# Altium PCB MAIN_PCB.PcbDoc
Units mm, origin at the board's own origin, x right, y up, seen from the top; angles counter-clockwise.
Board outline 115 x 170 mm, 2 copper layers (Top Layer, Bottom Layer); 11 components, 29 nets, 185 pads, 16 vias.
Unrouted connection lines stored in the file: 20.
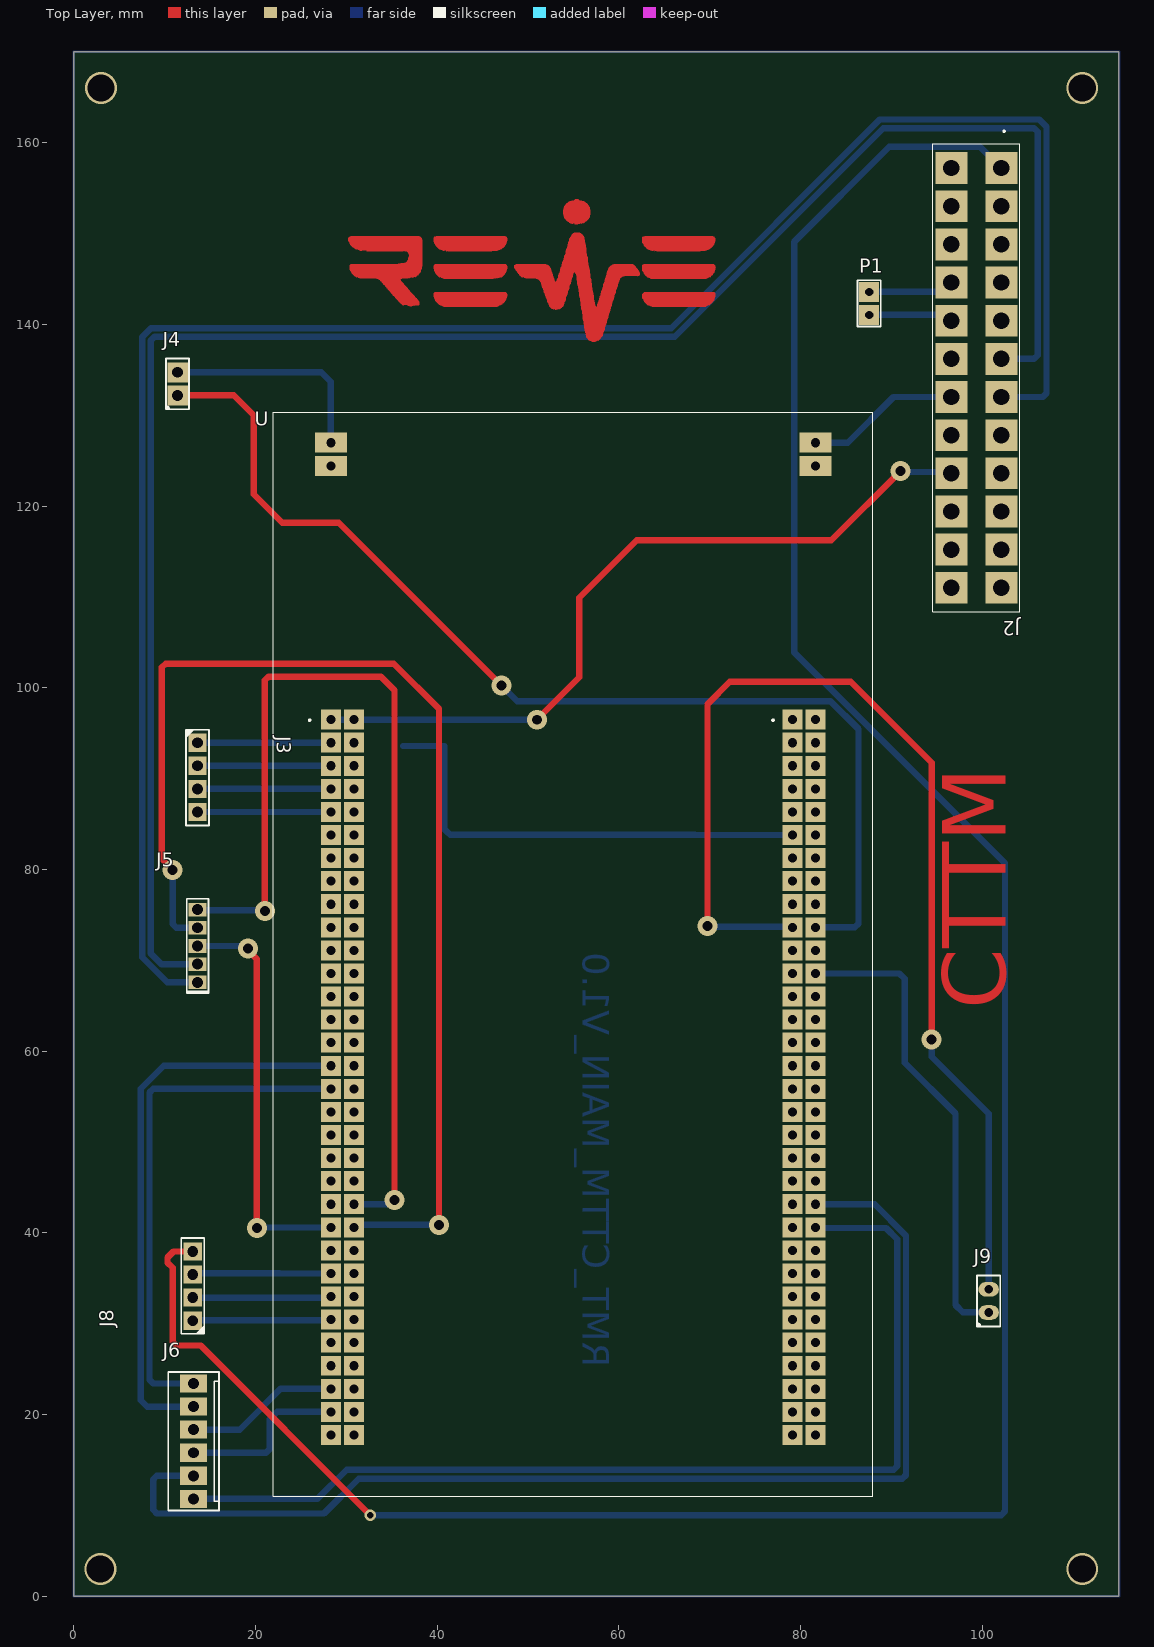
[diagram p0: Top Layer view]
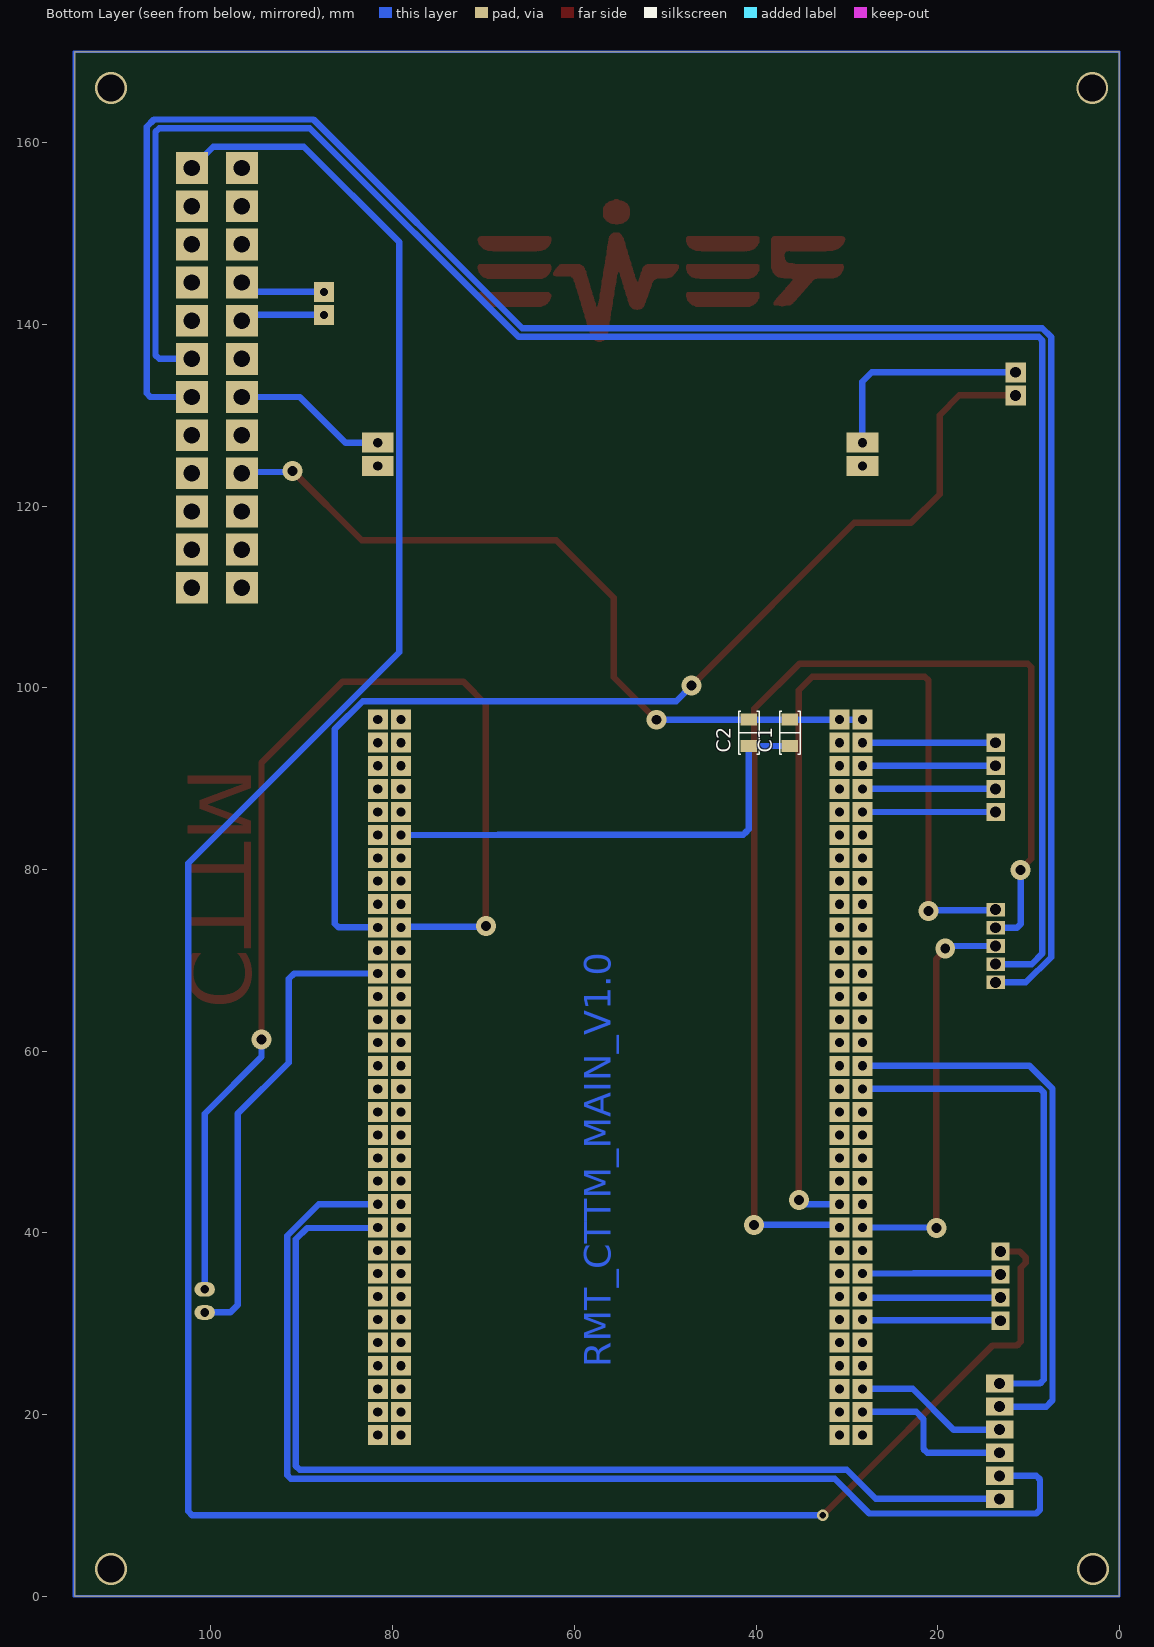
[diagram p1: Bottom Layer view, seen from below]
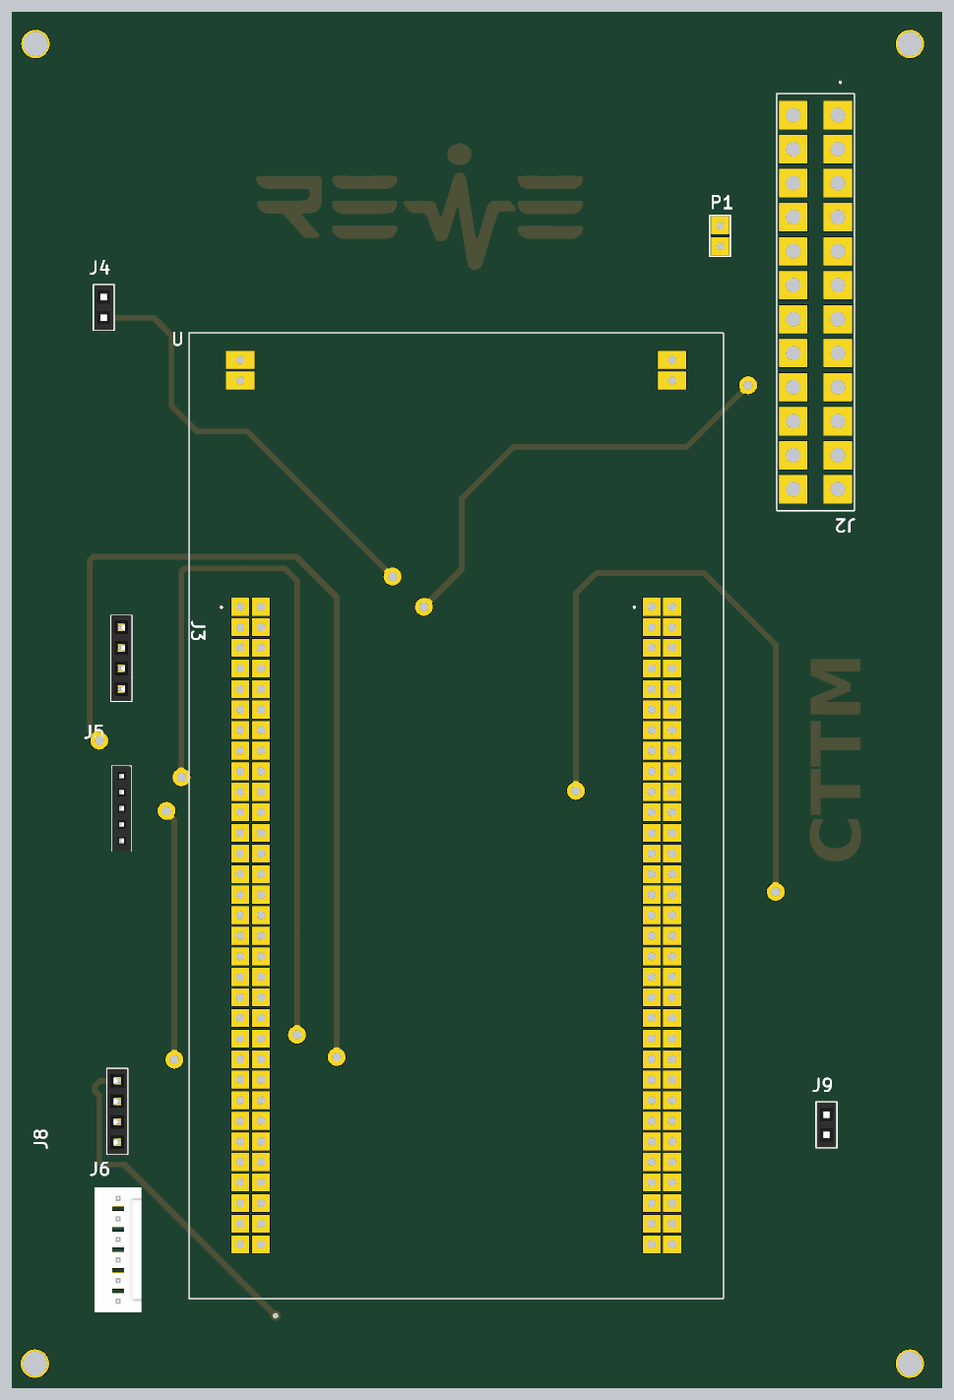
[diagram p2: 3D render of the assembled board from above, using the file's embedded part models]

## Layer stack, top to bottom
Top Solder: solder mask 0.0102, Solder Resist, Dk 3.5
Top Layer: signal copper 0.0356
Dielectric 1: dielectric 0.32, FR-4, Dk 4.8
Bottom Layer: signal copper 0.0356
Bottom Solder: solder mask 0.0102, Solder Resist, Dk 3.5

## Board outline
0,0 0,170 115,170 115,0

## Design rules (kind name [scope] priority, off if disabled: settings)
Clearance [All] p1: gap=0.254 ignorepadtopadclearanceinfootprint=FALSE except(0: Arc-Hole Track-Hole SMDPad-Hole THPad-Hole Via-Hole Fill-Hole Poly-Hole Region-Hole Text-Hole)
PolygonConnect [All] p1: connectstyle=Relief reliefconductorwidth=0.254 reliefentries=4 polygonreliefangle="90 Angle" airgapwidth=0.254
RoutingVias [All] p1: holewidth=0.711 width=1.27 viastyle="Through Hole" minholewidth=0.711 minwidth=1.27 maxholewidth=0.711 maxwidth=1.27
SolderMaskExpansion [All] p1: expansion=0.102 istentingtop=FALSE
Width [All] p1: maxlimit=0.7 minlimit=0.7 preferedwidth=0.7
30 further rules are at their usual default settings.

## Classes and differential pairs
component class "POWER_SUPPLY ATX24_PIN_SCH": J2 P1
component class MAIN_SCH: C1 C2 J3 J4 J5 J6 J8 J9 U

## Components (designator, comment, footprint, x,y, rotation, side; value= is the part's Value field where it differs from the comment)
C1 "100pF" "CAP 1206_3216 - 0.8MM" 36.275,95.038 r90 bottom
C2 "100pF" "CAP 1206_3216 - 0.8MM" 40.8,95.038 r90 bottom
J2 "4-1775099-8" TE_4-1775099-8 102.1,157.2 r270 top
J3 "M20-7820442" "HARWIN M20-7820445" 13.625,90.138 r0 top
J4 "LOAD_CELL" "SAMTEC SSW-102-03-T-S"#1 11.425,133.45 r90 top
J5 "NPPN051BFCN-RC" "SULLINS NPPN051BFCN" 13.625,71.575 r90 top
J6 "SWITCHING" "MOLEX KK 0022272061" 13.185,17.064 r90 top
J8 "M20-7820442" "HARWIN M20-7820445" 13.1,34.135 r180 top
J9 "SSW-102-03-T-S" "SAMTEC SSW-102-03-T-S"#2 100.7,32.5 r90 top
P1 "PS_JUMPER" HDR1X2 87.55,141.035 r90 top
U "STM32F429I-DISC1" MODULE_STM32F429I-DISC1 54.968,70.658 r0 top

## Footprints (in the part's own frame and the unit in brackets; to place one, negate y for a bottom-side part, rotate by r counter-clockwise, add the part's x,y. Pads: shape width x height; smd on the part's side, far side on the other; paste and mask are expansions set on the pad)
"CAP 1206_3216 - 0.8MM" [mm] "Chip Capacitor, 2-Leads, Body 3.25x1.60mm, IPC Medium Density"
  rect 1.3x1.8 smd: 1(-1.45,0) 2(1.45,0)
  silkscreen extent -2.37,-1.12 2.37,1.12, body extent -1.6,-0.8 1.6,0.8, height 0.8
"HARWIN M20-7820445" [mm] "2.54mm DIL PC TAIL PIN HEADER ASSEMBLY"
  rect 2x2 hole 1.2: 1(0,3.81) 2(0,1.27) 3(0,-1.27) 4(0,-3.81)
  silkscreen extent -1.27,-5.3 1.27,5.27, body extent -1.25,-5.28 1.25,5.28, height 8.5
HDR1X2 [mm] "Connector; Header; 2 Position"
  rect 2.2x2.2 hole 0.9: 1(0,0) 2(2.54,0)
  silkscreen extent -1.27,-1.27 3.81,1.27
MODULE_STM32F429I-DISC1 [mm]
  rect 3.5x2.2 hole 1: JP1_1(-26.67,56.31) JP1_2(-26.67,53.77) JP2_1(26.67,56.31) JP2_2(26.67,53.77)
  rect 2.2x2.2 hole 1: P1_1(-26.67,25.83) P1_2(-24.13,25.83) P1_3(-26.67,23.29) P1_4(-24.13,23.29) P1_5(-26.67,20.75) P1_6(-24.13,20.75) P1_7(-26.67,18.21) P1_8(-24.13,18.21) P1_9(-26.67,15.67) P1_10(-24.13,15.67) P1_11(-26.67,13.13) P1_12(-24.13,13.13) P1_13(-26.67,10.59) P1_14(-24.13,10.59) P1_15(-26.67,8.05) P1_16(-24.13,8.05) P1_17(-26.67,5.51) P1_18(-24.13,5.51) P1_19(-26.67,2.97) P1_20(-24.13,2.97) P1_21(-26.67,0.43) P1_22(-24.13,0.43) P1_23(-26.67,-2.11) P1_24(-24.13,-2.11) P1_25(-26.67,-4.65) P1_26(-24.13,-4.65) P1_27(-26.67,-7.19) P1_28(-24.13,-7.19) P1_29(-26.67,-9.73) P1_30(-24.13,-9.73) P1_31(-26.67,-12.27) P1_32(-24.13,-12.27) P1_33(-26.67,-14.81) P1_34(-24.13,-14.81) P1_35(-26.67,-17.35) P1_36(-24.13,-17.35) P1_37(-26.67,-19.89) P1_38(-24.13,-19.89) P1_39(-26.67,-22.43) P1_40(-24.13,-22.43) P1_41(-26.67,-24.97) P1_42(-24.13,-24.97) P1_43(-26.67,-27.51) P1_44(-24.13,-27.51) P1_45(-26.67,-30.05) P1_46(-24.13,-30.05) P1_47(-26.67,-32.59) P1_48(-24.13,-32.59) P1_49(-26.67,-35.13) P1_50(-24.13,-35.13) P1_51(-26.67,-37.67) P1_52(-24.13,-37.67) P1_53(-26.67,-40.21) P1_54(-24.13,-40.21) P1_55(-26.67,-42.75) P1_56(-24.13,-42.75) P1_57(-26.67,-45.29) P1_58(-24.13,-45.29) P1_59(-26.67,-47.83) P1_60(-24.13,-47.83) P1_61(-26.67,-50.37) P1_62(-24.13,-50.37) P1_63(-26.67,-52.91) P1_64(-24.13,-52.91) P2_1(24.13,25.83) P2_2(26.67,25.83) P2_3(24.13,23.29) P2_4(26.67,23.29) P2_5(24.13,20.75) P2_6(26.67,20.75) P2_7(24.13,18.21) P2_8(26.67,18.21) P2_9(24.13,15.67) P2_10(26.67,15.67) P2_11(24.13,13.13) P2_12(26.67,13.13) P2_13(24.13,10.59) P2_14(26.67,10.59) P2_15(24.13,8.05) P2_16(26.67,8.05) P2_17(24.13,5.51) P2_18(26.67,5.51) P2_19(24.13,2.97) P2_20(26.67,2.97) P2_21(24.13,0.43) P2_22(26.67,0.43) P2_23(24.13,-2.11) P2_24(26.67,-2.11) P2_25(24.13,-4.65) P2_26(26.67,-4.65) P2_27(24.13,-7.19) P2_28(26.67,-7.19) P2_29(24.13,-9.73) P2_30(26.67,-9.73) P2_31(24.13,-12.27) P2_32(26.67,-12.27) P2_33(24.13,-14.81) P2_34(26.67,-14.81) P2_35(24.13,-17.35) P2_36(26.67,-17.35) P2_37(24.13,-19.89) P2_38(26.67,-19.89) P2_39(24.13,-22.43) P2_40(26.67,-22.43) P2_41(24.13,-24.97) P2_42(26.67,-24.97) P2_43(24.13,-27.51) P2_44(26.67,-27.51) P2_45(24.13,-30.05) P2_46(26.67,-30.05) P2_47(24.13,-32.59) P2_48(26.67,-32.59) P2_49(24.13,-35.13) P2_50(26.67,-35.13) P2_51(24.13,-37.67) P2_52(26.67,-37.67) P2_53(24.13,-40.21) P2_54(26.67,-40.21) P2_55(24.13,-42.75) P2_56(26.67,-42.75) P2_57(24.13,-45.29) P2_58(26.67,-45.29) P2_59(24.13,-47.83) P2_60(26.67,-47.83) P2_61(24.13,-50.37) P2_62(26.67,-50.37) P2_63(24.13,-52.91) P2_64(26.67,-52.91)
  silkscreen extent -33,-59.65 33,59.65
"MOLEX KK 0022272061" [mm]
  rect 2x3 hole 1.2: 1(-6.35,0) 2(-3.81,0) 3(-1.27,0) 4(1.27,0) 5(3.81,0) 6(6.35,0)
  silkscreen extent -7.62,-2.79 7.62,2.79, body extent -7.62,-2.9 7.62,2.9, height 11.7
"SAMTEC SSW-102-03-T-S"#1 [mm]
  rect 2.2x2.25 hole 1.2: 1(-1.27,0) 2(1.27,0)
  silkscreen extent -2.8,-1.27 2.8,1.27, body extent -2.79,-1.21 2.79,1.21, height 8.51
"SAMTEC SSW-102-03-T-S"#2 [mm]
  oval 1.6x2.25 hole 0.95: 1(-1.27,0) 2(1.27,0)
  silkscreen extent -2.8,-1.27 2.8,1.27, body extent -2.79,-1.21 2.79,1.21, height 8.51
"SULLINS NPPN051BFCN" [mm]
  rect 1.5x2 hole 1.2: 1(-4,0) 2(-2,0) 3(0,0) 4(2,0) 5(4,0)
  silkscreen extent -5.2,-1.2 5.2,1.2, body extent -5.25,-1.2 5.25,1.2, height 4.41
TE_4-1775099-8 [mm]
  rect 3.5x3.5 hole 1.8: 1(0,0) 2(0,-5.5) 3(4.2,0) 4(4.2,-5.5) 5(8.4,0) 6(8.4,-5.5) 7(12.6,0) 8(12.6,-5.5) 9(16.8,0) 10(16.8,-5.5) 11(21,0) 12(21,-5.5) 13(25.2,0) 14(25.2,-5.5) 15(29.4,0) 16(29.4,-5.5) 17(33.6,0) 18(33.6,-5.5) 19(37.8,0) 20(37.8,-5.5) 21(42,0) 22(42,-5.5) 23(46.2,0) 24(46.2,-5.5)
  silkscreen extent -4.15,-7.55 48.85,2.05

## Part data
C1 C2: library part MM061A101JCT2A, "CAP CER 100PF 100V C0G/NP0 1206", Device Package="1206 (3216 Metric)", Manufacturer="AVX Corporation", Operating Temperature="-55°C ~ 125°C", Supplier Part Number 1=478-10622-1-ND, Temperature Coefficient="C0G, NP0", Tolerance=±5%, Voltage - Rated=100V, Applications="Medical, Non-Critical", Capacitance=100pF, ComponentLink1Description=Datasheet, ComponentLink1URL=http://datasheets.avx.com/AVX-MM.pdf, ComponentLink2Description="DigiKey Link", ComponentLink2URL=http://digikey.com/product-detail/en/avx-corporation/MM061A101JCT2A/478-10622-1-ND/7344883, LastUpdated="9/2/2020 1:04:46 AM", Lifecycle Status=Active, Minimum Order=1, Mounting Type="Surface Mount, MLCC", Package / Case="1206 (3216 Metric)", Packaging=TapeAndReel, Part Number=MM061A101JCT2A, Part Status=Active, PartId=18685, Price=0.52, Series=MM, Size / Dimension="0.126\" L x 0.063\" W (3.20mm x 1.60mm)", Supplier 1=DigiKey, Thickness (Max)="0.029\" (0.74mm)"
J2: "Conn Power PL 24 POS 4.2mm Solder ST Thru-Hole 4 Terminal 1 Port Tray", Package=None, Availability=Unavailable, MP=4-1775099-8, Price=None
J3 J8: "CONN RCPT 4POS 0.1 GOLD PCB", Current Rating (Amps)=3A, Insulation Color=Black, Manufacturer="Harwin Inc.", Material Flammability Rating="UL94 V-0", Operating Temperature="-40°C ~ 105°C", Supplier Part Number 1=952-1791-ND, ComponentLink1Description=Datasheet, ComponentLink1URL=https://cdn.harwin.com/pdfs/Harwin_PC_Connectors_M20.pdf, ComponentLink2Description="DigiKey Link", ComponentLink2URL=https://www.digikey.com/en/products/detail/harwin-inc/M20-7820442/3727760, Connector Type=Receptacle, Contact Finish - Mating=Gold, Contact Finish - Post=Tin, Contact Finish Thickness - Mating=Flash, Contact Length - Post="0.118\" (3.00mm)", Contact Type="Female Socket", Fastening Type=Push-Pull, Insulation Height="0.335\" (8.51mm)", LastUpdated="9/21/2022 6:57:11 PM", Lifecycle Status=Active, Mated Stacking Heights="11.04mm, 12.63mm", Minimum Order=1, Mounting Type="Through Hole", Number of Positions=4, Number of Positions Loaded=All, Number of Rows=1, Packaging=Tube, Part Number=M20-7820442, Part Status=Active, Pitch - Mating="0.100\" (2.54mm)", Price=0.45, Series=M20, Style="Board to Board or Cable", Supplier 1=DigiKey, Termination=Solder
J4: library part SSW-102-03-T-S, "CONN RCPT 2POS 0.1 TIN PCB", Current Rating (Amps)="5.7A per Contact", Insulation Color=Black, Manufacturer="Samtec Inc.", Material Flammability Rating="UL94 V-0", Operating Temperature="-55°C ~ 105°C", Supplier Part Number 1=SSW-102-03-T-S-ND, ComponentLink2Description="DigiKey Link", ComponentLink2URL=http://digikey.com/product-detail/en/samtec-inc/SSW-102-03-T-S/SSW-102-03-T-S-ND/7873010, Connector Type=Receptacle, Contact Finish - Mating=Tin, Contact Finish - Post=Tin, Contact Type=Forked, Fastening Type=Push-Pull, LastUpdated="6/21/2022 3:06:02 PM", Lifecycle Status=Active, Minimum Order=1, Mounting Type="Through Hole", Number of Positions=2, Number of Positions Loaded=All, Number of Rows=1, Packaging=Bulk, Part Number=SSW-102-03-T-S, Part Status=Active, Price=0.53, Series=SSW, Style="Board to Board or Cable", Supplier 1=DigiKey, Termination=Solder
J5: "CONN HDR 5POS 0.079 GOLD PCB", Current Rating (Amps)=2A, Insulation Color=Black, Manufacturer="Sullins Connector Solutions", Material Flammability Rating="UL94 V-0", Operating Temperature="-40°C ~ 105°C", Supplier Part Number 1=S5751-05-ND, ComponentLink1Description=Datasheet, ComponentLink1URL=https://drawings-pdf.s3.amazonaws.com/10483.pdf, ComponentLink2Description="DigiKey Link", ComponentLink2URL=https://www.digikey.com/en/products/detail/sullins-connector-solutions/NPPN051BFCN-RC/804807, Connector Type=Header, Contact Finish - Mating=Gold, Contact Finish - Post=Gold, Contact Finish Thickness - Mating=Flash, Contact Length - Post="0.094\" (2.40mm)", Contact Type="Female Socket", Fastening Type=Push-Pull, Insulation Height="0.173\" (4.40mm)", LastUpdated="6/21/2022 2:43:08 PM", Lifecycle Status=Active, Minimum Order=1, Mounting Type="Through Hole", Number of Positions=5, Number of Positions Loaded=All, Number of Rows=1, Packaging=Tube, Part Number=NPPN051BFCN-RC, Part Status=Active, Pitch - Mating="0.079\" (2.00mm)", Price=0.35, Series=-, Style="Board to Board", Supplier 1=DigiKey, Termination=Solder
J6: library part 0022272061, "CONN HEADER VERT 6POS 2.54MM", Insulation Color=Natural, Manufacturer=Molex, Material Flammability Rating="UL94 V-0", Supplier Part Number 1=WM4115-ND, ComponentLink1Description=Datasheet, ComponentLink1URL=https://www.molex.com/pdm_docs/sd/022272061_sd.pdf, ComponentLink2Description="DigiKey Link", ComponentLink2URL=http://digikey.com/product-detail/en/molex/0022272061/WM4115-ND/1130581, Connector Type=Header, Contact Finish - Mating=Tin, Contact Finish - Post=Tin, Contact Finish Thickness - Mating="100.0µin (2.54µm)", Contact Length - Mating="0.295\" (7.49mm)", Contact Length - Post="0.140\" (3.56mm)", Contact Material=Brass, Contact Shape=Square, Contact Type="Male Pin", Fastening Type="Friction Lock", Insulation Height="0.461\" (11.70mm)", Insulation Material="Polyamide (PA), Nylon", LastUpdated="1/12/2020 11:52:24 PM", Lifecycle Status=Active, Minimum Order=1, Mounting Type="Through Hole", Number of Positions=6, Number of Positions Loaded=All, Number of Rows=1, Overall Contact Length="0.560\" (14.22mm)", Packaging=Bulk, Part Number=0022272061, Part Status=Active, PartId=80, Pitch - Mating="0.100\" (2.54mm)", Price=0.49, Series="KK 6410", Shrouding="Shrouded - 1 Wall", Style="Board to Cable/Wire", Supplier 1=DigiKey, Termination=Solder
J9: "CONN RCPT 2POS 0.1 TIN PCB", Current Rating (Amps)="5.7A per Contact", Insulation Color=Black, Manufacturer="Samtec Inc.", Material Flammability Rating="UL94 V-0", Operating Temperature="-55°C ~ 105°C", Supplier Part Number 1=SSW-102-03-T-S-ND, ComponentLink2Description="DigiKey Link", ComponentLink2URL=http://digikey.com/product-detail/en/samtec-inc/SSW-102-03-T-S/SSW-102-03-T-S-ND/7873010, Connector Type=Receptacle, Contact Finish - Mating=Tin, Contact Finish - Post=Tin, Contact Type=Forked, Fastening Type=Push-Pull, LastUpdated="6/21/2022 3:06:02 PM", Lifecycle Status=Active, Minimum Order=1, Mounting Type="Through Hole", Number of Positions=2, Number of Positions Loaded=All, Number of Rows=1, Packaging=Bulk, Part Number=SSW-102-03-T-S, Part Status=Active, Price=0.53, Series=SSW, Style="Board to Board or Cable", Supplier 1=DigiKey, Termination=Solder
P1: library part "Header 2", "Header, 2-Pin", LatestRevisionDate=17-Jul-2002, LatestRevisionNote="Re-released for DXP Platform.", Publisher="Altium Limited"
U: "STM32F429 Discovery STM32F4 ARMÂ® CortexÂ®-M4 MCU 32-Bit Embedded Evaluation Board", Package="SOIC-14 STMicroelectronics", Availability=Unavailable, MF=STMicroelectronics, MP=STM32F429I-DISC1, Price=None, SnapEDA_Link=https://www.snapeda.com/parts/STM32F429I-DISC1/STMicroelectronics/view-part/504905/?ref=snap

## Via types
v1: diameter 2.2, hole 1.1, Top Layer to Bottom Layer, 11 vias
v2: diameter 3.5, hole 3, Top Layer to Bottom Layer, 4 vias
v3: diameter 1.27, hole 0.711, Top Layer to Bottom Layer, tented both sides, 1 vias

## Nets (pads, with @x,y where several pads share a name; then routed paths per layer and width w, separated by ;. In a path a pad name is that pad's centre, name@x,y a point inside that pad or via, vN(x,y) a via of type N, cw(c..) or ccw(c..) an arc to the next point about the centre after c; other vN are vias at no path point)
3V3: J2.1 J8.4 | length 289.7
  Top Layer w0.7: J8.4 10.97,37.945 10.315,37.29 10.315,36.71 10.875,36.15 10.875,28.01 11.285,27.6 13.975,27.6 v3(32.65,8.925)
  Bottom Layer w0.7: v3(32.65,8.925) 102.09,8.925 102.5,9.335 102.5,80.674 79.284,103.89 79.284,149.059 89.779,159.554 99.746,159.554 J2.1
+3V3: J2.2 J2.23
+3V3_MC: J2.3
+5V: J2.7 J2.11 J2.20 J2.22 J5.2 | length 209.3
  Bottom Layer w0.7: J5.2 9.65,69.575 8.479,70.746 8.479,138.215 8.889,138.625 66.149,138.625 89.114,161.59 105.69,161.59 106.1,161.18 106.1,136.61 105.69,136.2 J2.11
+5V_MC: C1.2 C2.2 J2.18 U.P1_1 U.P1_2 | length 84.9
  Top Layer w0.7: v1(50.975,96.475) 55.65,101.15 55.65,109.89 61.975,116.215 83.39,116.215 v1(91.025,123.85)
  Bottom Layer w0.7: U.P1_1 U.P1_2 C1.2 C2.2 40.807,96.482 50.968,96.482 v1(50.975,96.475) ; v1(91.025,123.85) 91.134,123.741 96.459,123.741 J2.18
+12V: J2.19 J2.21
ADC_CHA0: J9.2 U.P2_19 | length 123.8
  Top Layer w0.7: v1(69.75,73.75) 69.75,98.2 72.2,100.65 85.515,100.65 94.436,91.729 v1(94.436,61.275)
  Bottom Layer w0.7: v1(69.75,73.75) 69.811,73.689 79.037,73.689 U.P2_19 ; v1(94.436,61.275) 94.436,59.364 100.7,53.1 J9.2
AIR_VALUE: J6.5 U.P1_31 | length 62.4
  Bottom Layer w0.7: J6.5 8.076,20.874 7.375,21.575 7.375,55.86 9.903,58.388 U.P1_31
DIRECTION: J8.3 U.P1_49 | length 15.4
  Bottom Layer w0.7: J8.3 13.244,35.549 22.633,35.549 22.654,35.528 U.P1_49 U.P1_49@28.194,35.424
ENABLE: J8.2 U.P1_51 | length 15.3
  Bottom Layer w0.7: J8.2 13.123,32.842 28.152,32.842 U.P1_51
GND: J2.5 J2.6 J2.9 J2.10 J2.12 J2.13 J2.24 J5.1 P1.1 | length 229.5
  Bottom Layer w0.7: J5.1 10.301,67.575 7.525,70.351 7.525,138.61 8.494,139.579 65.754,139.579 88.719,162.544 106.27,162.544 107.075,161.739 107.075,132.41 106.665,132 J2.13 ; P1.1 95.586,141.035 96.221,140.4 J2.10 J2.10@96.868,140.668
GND_MC: C1.1 C2.1 J2.14 J4.2 U.JP1_1 U.JP1_2 U.JP2_1 U.JP2_2 U.P1_63 U.P1_64 U.P2_11 U.P2_29 U.P2_63 U.P2_64 | length 93.3
  Bottom Layer w0.7: J4.2 27.255,134.72 28.298,133.677 U.JP1_1 ; C1.1 C2.1 40.8,84.425 41.101,84.124 41.425,83.8 68.375,83.8 68.387,83.788 U.P2_11 ; U.JP2_1 85.193,126.968 90.225,132 J2.14
HEATER_SWITCH: J6.3 U.P1_61 | length 18.9
  Bottom Layer w0.7: J6.3 21.157,15.794 21.567,16.204 21.567,19.477 22.378,20.288 U.P1_61
LOADCELL: J4.1 U.P2_20 | length 121.6
  Top Layer w0.7: J4.1 17.62,132.18 19.8,130 19.8,121.3 22.95,118.15 29.175,118.15 v1(47.1,100.225)
  Bottom Layer w0.7: v1(47.1,100.225) 48.8,98.525 83.3,98.525 86.375,95.45 86.375,74.038 85.965,73.628 U.P2_20
MAX_LIM: J3.1 U.P1_3 | length 14.7
  Bottom Layer w0.7: J3.1 U.P1_3
MIN_LIM: J3.2 U.P1_5 | length 14.7
  Bottom Layer w0.7: J3.2 U.P1_5
MISO_SPI3: J5.5 U.P1_44 | length 108.7
  Top Layer w0.7: v1(21.025,75.425) 21.025,100.815 21.435,101.225 33.815,101.225 35.3,99.74 v1(35.3,43.625)
  Bottom Layer w0.7: J5.5 13.7,75.5 20.95,75.5 v1(21.025,75.425) ; U.P1_44 34.669,43.148 35.146,43.625 v1(35.3,43.625)
MOSI_SPI3: U.P1_43
PS-ON: J2.8 P1.2 | length 9.7
  Bottom Layer w0.7: P1.2@87.334,143.575 P1.2 95.196,143.575 96.221,144.6 J2.8
PULSE: J8.1 U.P1_53 | length 15.2
  Bottom Layer w0.7: J8.1 13.162,30.387 28.237,30.387 U.P1_53
PUMP_IN: J6.6 U.P1_33 | length 56.8
  Bottom Layer w0.7: J6.6 8.739,23.414 8.329,23.824 8.329,55.438 8.739,55.848 U.P1_33
PUMP_OUT: J6.4 U.P1_59 | length 17
  Bottom Layer w0.7: J6.4 18.265,18.334 22.759,22.828 U.P1_59
SCLIK_SPI3: J5.3 U.P1_45 | length 45
  Top Layer w0.7: v1(19.175,71.275) 19.175,71.121 20.15,70.146 v1(20.15,40.55)
  Bottom Layer w0.7: J5.3 18.721,71.575 19.021,71.275 v1(19.175,71.275) ; v1(20.15,40.55) 20.179,40.579 28.269,40.579 U.P1_45
SSEL_SPI3: J5.4 U.P1_46 | length 130.7
  Top Layer w0.7: v1(10.875,79.95) 10.875,79.983 9.7,81.158 9.7,102.24 10.11,102.65 35.225,102.65 40.2,97.675 v1(40.2,40.875)
  Bottom Layer w0.7: v1(10.875,79.95) 10.875,73.985 11.285,73.575 J5.4 ; U.P1_46 31.105,40.875 v1(40.2,40.875)
TEMP: J9.1 U.P2_24 | length 52.3
  Bottom Layer w0.7: U.P2_24 90.852,68.548 91.45,67.95 91.45,58.736 97.05,53.136 97.05,32.05 97.85,31.25 100.68,31.25 J9.1
VALUE_1: J6.2 U.P2_44 | length 130.5
  Bottom Layer w0.7: J6.2 9.15,13.254 8.74,12.844 8.74,9.52 9.15,9.11 27.535,9.11 31.35,12.925 91.199,12.925 91.609,13.335 91.609,39.684 88.145,43.148 U.P2_44
VALUE_2: J6.1 U.P2_46 | length 113.5
  Bottom Layer w0.7: J6.1 26.825,10.714 30.036,13.925 90.245,13.925 90.655,14.335 90.655,39.289 89.407,40.537 81.709,40.537 U.P2_46
WATER_INT: J3.3 U.P1_7 | length 14.7
  Bottom Layer w0.7: J3.3 U.P1_7
WATER_INT2: J3.4 U.P1_9 | length 14.7
  Bottom Layer w0.7: J3.4 U.P1_9
pads on no net: J2.4 J2.15 J2.16 J2.17 U.P1_4 U.P1_6 U.P1_8 U.P1_10 U.P1_11 U.P1_12 U.P1_13 U.P1_14 U.P1_15 U.P1_16 U.P1_17 U.P1_18 U.P1_19 U.P1_20 U.P1_21 U.P1_22 U.P1_23 U.P1_24 U.P1_25 U.P1_26 U.P1_27 U.P1_28 U.P1_29 U.P1_30 U.P1_32 U.P1_34 U.P1_35 U.P1_36 U.P1_37 U.P1_38 U.P1_39 U.P1_40 U.P1_41 U.P1_42 U.P1_47 U.P1_48 U.P1_50 U.P1_52 U.P1_54 U.P1_55 U.P1_56 U.P1_57 U.P1_58 U.P1_60 U.P1_62 U.P2_1 U.P2_2 U.P2_3 U.P2_4 U.P2_5 U.P2_6 U.P2_7 U.P2_8 U.P2_9 U.P2_10 U.P2_12 U.P2_13 U.P2_14 U.P2_15 U.P2_16 U.P2_17 U.P2_18 U.P2_21 U.P2_22 U.P2_23 U.P2_25 U.P2_26 U.P2_27 U.P2_28 U.P2_30 U.P2_31 U.P2_32 U.P2_33 U.P2_34 U.P2_35 U.P2_36 U.P2_37 U.P2_38 U.P2_39 U.P2_40 U.P2_41 U.P2_42 U.P2_43 U.P2_45 U.P2_47 U.P2_48 U.P2_49 U.P2_50 U.P2_51 U.P2_52 U.P2_53 U.P2_54 U.P2_55 U.P2_56 U.P2_57 U.P2_58 U.P2_59 U.P2_60 U.P2_61 U.P2_62
copper on no net: | length 570.2
  Bottom Layer w0.254: 0,0 115.1,0 115.1,170 0,170 0,0
  other v2: 2.925,3 111,3 3,166 111,166

## Other copper
Top Layer:
  region: 187 vertices and 0 holes, not listed, extent 62.553,141.936 70.613,143.557
  region: 167 vertices and 0 holes, not listed, extent 62.553,144.996 70.636,146.594
  region: 474 vertices and 0 holes, not listed, extent 62.553,148.055 70.613,149.699
  region: 307 vertices and 0 holes, not listed, extent 53.876,151.024 56.844,153.764
  region: 1698 vertices and 0 holes, not listed, extent 48.487,138.077 62.324,150.088
  region: 173 vertices and 0 holes, not listed, extent 39.628,141.936 47.688,143.557
  region: 183 vertices and 0 holes, not listed, extent 39.628,144.996 47.688,146.64
  region: 461 vertices and 0 holes, not listed, extent 39.628,148.055 47.688,149.699
  region: 1047 vertices and 0 holes, not listed, extent 30.198,142.005 38.349,149.677
  text "CTTM" at 104.87,64.621 h12 r90
Bottom Layer:
  text "RMT_CTTM_MAIN_V1.0" at 55.017,25.179 h5 r270